# EAGLE board Generador de funciones ander (EAGLE 7.6.0)
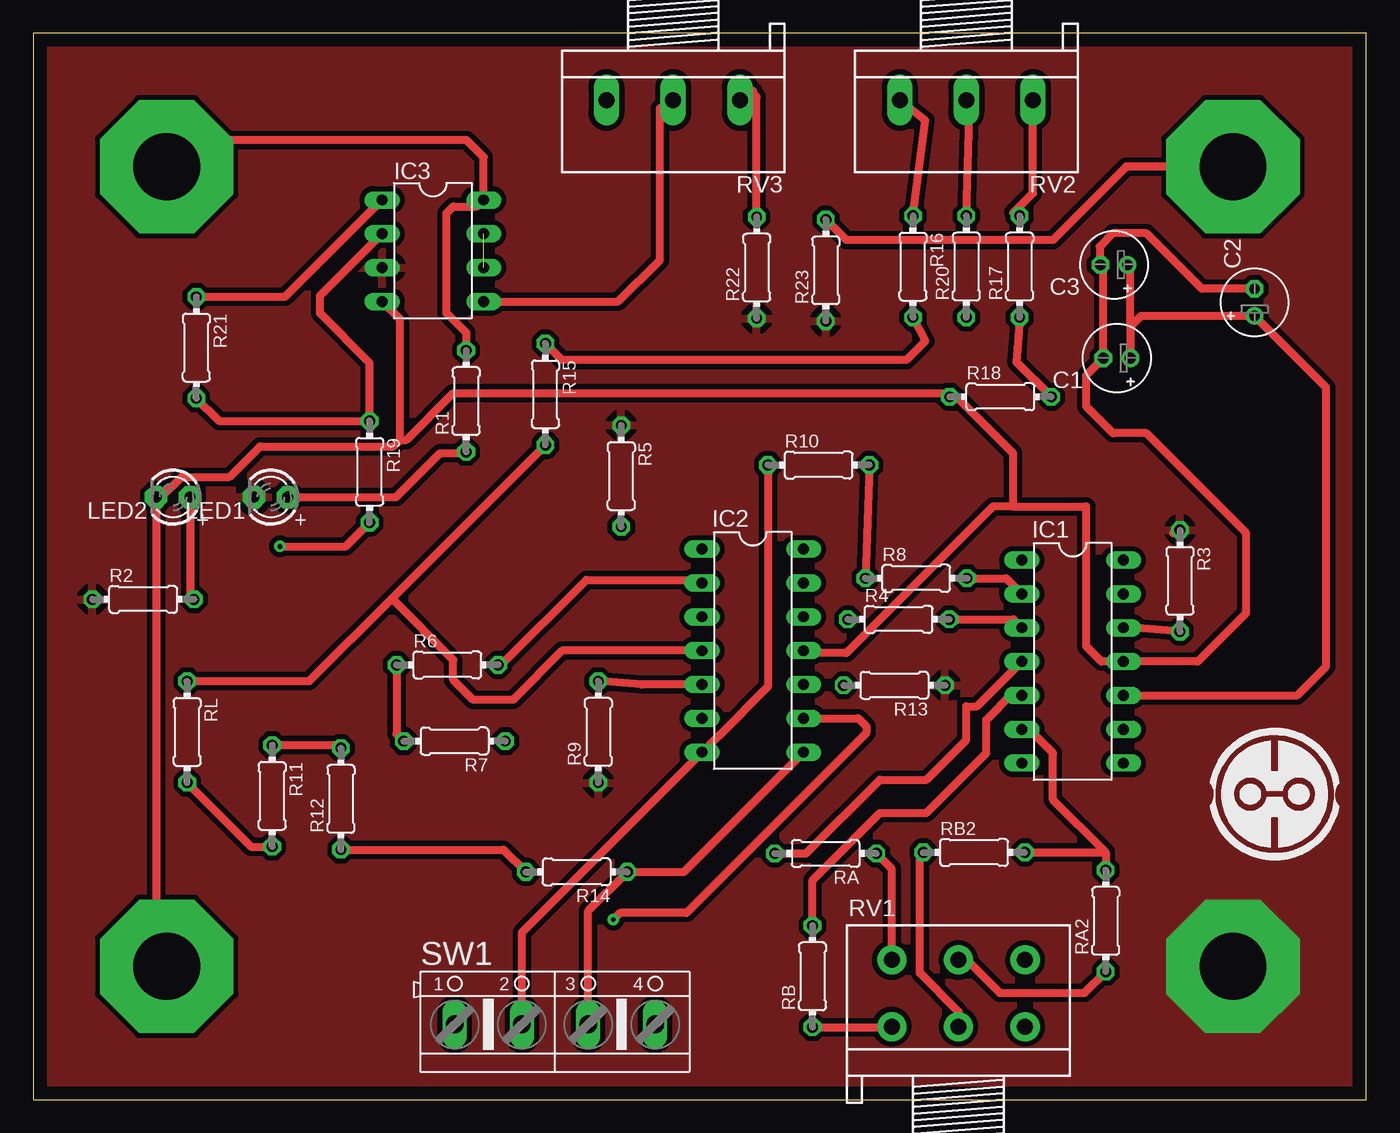
[diagram p0: board, top side]
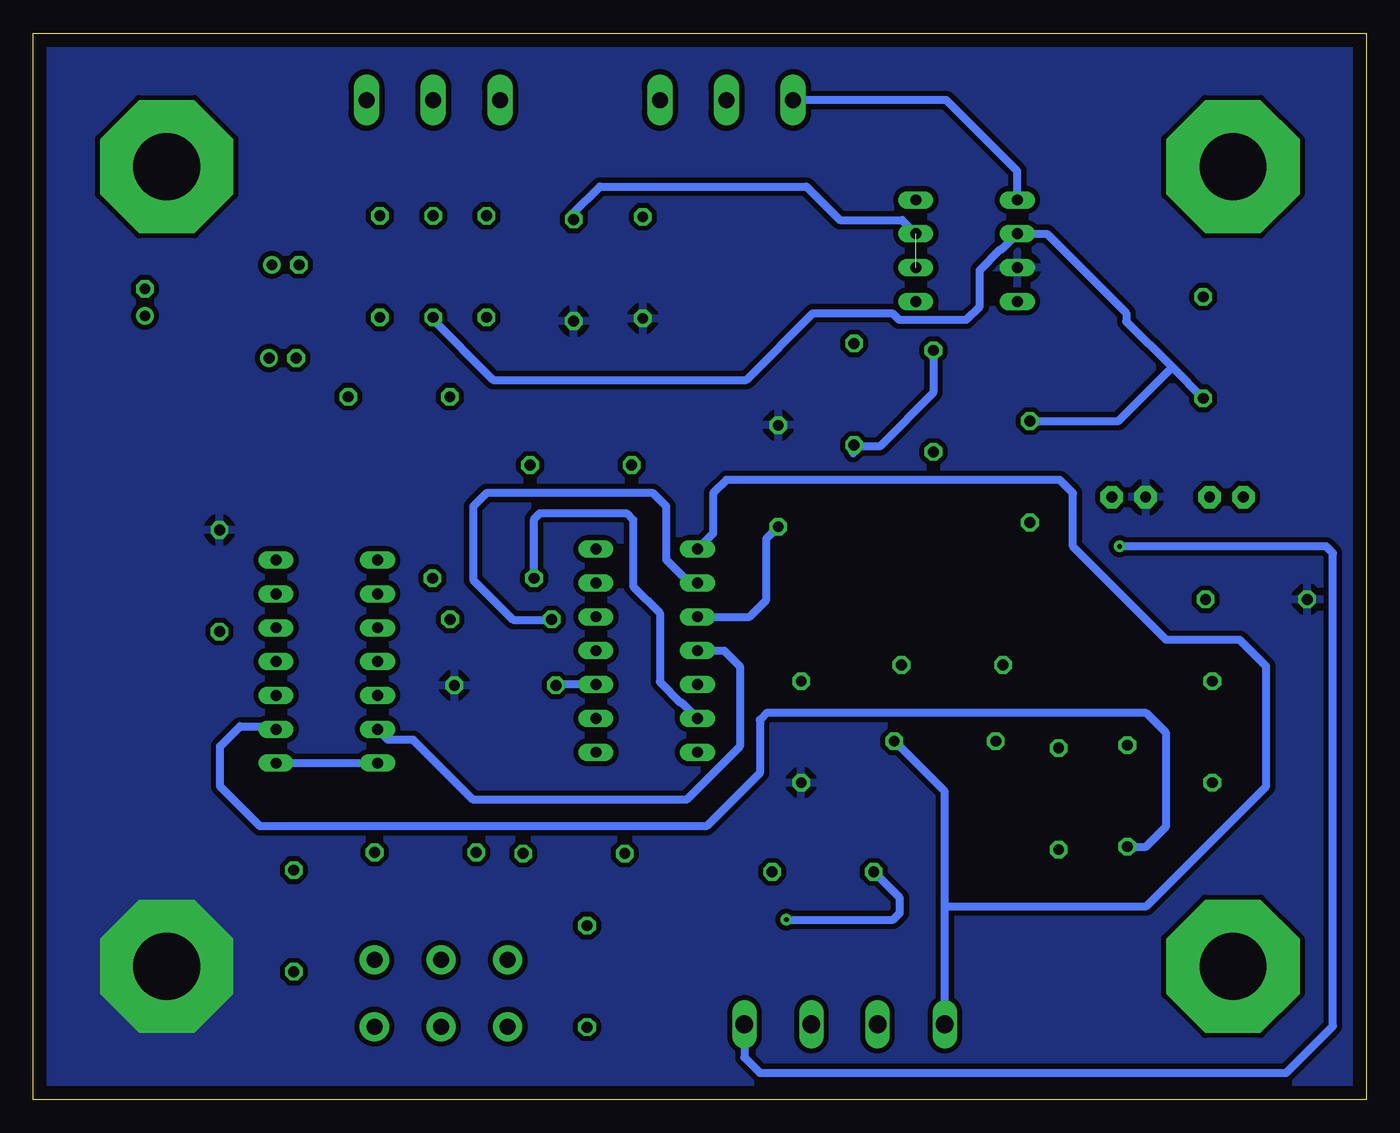
[diagram p1: board, bottom side, seen from below]

Size 100 x 80 mm. Coordinates in mm from the lower left corner, seen from the top.
Outline: 0,0 100,0 100,80 0,80 0,0
Copper layers (1*16): Top 0.035mm / dielectric 1.5mm / Bottom 0.035mm
Design rules "DRC_Serigrafia_2capa": minimum track width 25mil, minimum drill 0.7mm, track to track 15mil, track to pad 15mil, pad to pad 15mil, via to via 15mil, smd to smd 10mil, copper to edge 40mil, drill to drill 15mil, minimum pad ring 10mil, minimum via ring 10mil, stop-mask expansion 4mil, vias tented up to drill 0mil, thermal gap 20mil

## Footprints (pad centres in the part's own frame; a part is rotated, then mirrored left to right if it is on the bottom)
E2-5 = drill 0.813 pad 1.27: + -1.016,0 | drill 0.813 pad 1.27 octagon: - 1.016,0
DIL14 = drill 0.813 long: 1 -7.62,-3.81; 2 -5.08,-3.81; 3 -2.54,-3.81; 4 0,-3.81; 5 2.54,-3.81; 6 5.08,-3.81; 7 7.62,-3.81; 8 7.62,3.81; 9 5.08,3.81; 10 2.54,3.81; 11 0,3.81; 12 -2.54,3.81; 13 -5.08,3.81; 14 -7.62,3.81
DIL08 = drill 0.813 pad 1.27 long: 1 -3.81,-3.81; 2 -1.27,-3.81; 3 1.27,-3.81; 4 3.81,-3.81; 5 3.81,3.81; 6 1.27,3.81; 7 -1.27,3.81; 8 -3.81,3.81
LED3MM = drill 0.813 pad 1.676 octagon: A -1.27,0; K 1.27,0
0204/7 = drill 0.813 octagon: 1 -3.81,0; 2 3.81,0
3RP/1610G = drill 1.2 pad 2.184: 1-1 -5,0; 1-2 0,0; 1-3 5,0; 2-1 -5,5; 2-2 0,5; 2-3 5,5
3RP/1610N = drill 1.2 pad 1.93 long: 1 -5,0; 2 0,0; 3 5,0
AK500/4 = drill 1.321 long: 1 -7.518,0; 2 -2.489,0; 3 2.489,0; 4 7.518,0

## Placement (x,y rotation side)
C1  10u  [E2-5]  81.3,55.63 180 top
C2  47u  [E2-5]  91.63,59.81 90 top
C3  47u  [E2-5]  81.08,62.63 180 top
IC1  ICL8038  [DIL14]  77.98,32.86 270 top
IC2  TL084P  [DIL14]  53.98,33.68 270 top
IC3  LF353N  [DIL08]  29.98,63.69 270 top
LED1  [LED3MM]  17.82,45.2 180 top
LED2  [LED3MM]  10.48,45.2 180 top
R1  3k3  [0204/7]  32.47,52.4 90 top
R2  3k3  [0204/7]  8.24,37.53 0 top
R3  82k  [0204/7]  86.03,38.92 270 top
R4  100k  [0204/7]  64.92,36.03 0 top
R5  56k  [0204/7]  44.11,46.78 270 top
R6  100k  [0204/7]  31.06,32.61 0 top
R7  33k  [0204/7]  31.6,26.89 180 top
R8  51k  [0204/7]  66.24,39.11 0 top
R9  33k  [0204/7]  42.39,27.58 90 top
R10  100k  [0204/7]  58.92,47.61 0 top
R11  20k  [0204/7]  17.92,22.78 270 top
R12  220k  [0204/7]  23.08,22.56 90 top
R13  68k  [0204/7]  64.6,31.08 180 top
R14  100k  [0204/7]  40.76,17.08 180 top
R15  2k  [0204/7]  38.42,52.92 270 top
R16  68k  [0204/7]  66,62.5 270 top
R17  2k  [0204/7]  74,62.5 90 top
R18  68k  [0204/7]  72.56,52.73 0 top
R19  1M  [0204/7]  25.23,47.1 270 top
R20  1M  [0204/7]  70,62.5 90 top
R21  1M  [0204/7]  12.23,56.42 270 top
R22  100R  [0204/7]  54.27,62.42 90 top
R23  20k  [0204/7]  59.46,62.22 90 top
RA  10k  [0204/7]  59.44,18.46 180 top
RA2  1k  [0204/7]  80.46,13.4 90 top
RB  10k  [0204/7]  58.46,9.24 90 top
RB2  1k  [0204/7]  70.58,18.54 0 top
RL  4k7  [0204/7]  11.54,27.58 270 top
RV1  500k  [3RP/1610G]  69.41,5.47 0 top
RV2  100k  [3RP/1610N]  70,75 180 top
RV3  10k  [3RP/1610N]  48,75 180 top
SW1  [AK500/4]  39.14,5.64 0 top
U$1  LOGO_REDUCIDO  [LOGO_10MMX10MM]  93.13,22.91 0 top

## Library data of the parts
C1-C3 = rcl
IC1 = exar; OC_FARNELL: unknown; OC_NEWARK: unknown
IC2 IC3 = linear
LED1 LED2 = adafruit
R1-R23 RA RA2 RB RB2 RL = resistor
RV1-RV3 = pot
SW1 = con-ptr500; OC_FARNELL: unknown; OC_NEWARK: unknown
U$1 = Ingenialo_logos

## Nets
+12V: IC1.6 IC2.4 IC3.8 R1.2 R15.2 RA2.2 RB2.2 RL.1
-12V: C1.- C2.- C3.- IC1.11 IC2.11 IC3.4 LED2.K R18.1
GND: IC3.3 LED1.K R2.1 R3.1 R5.1 R9.1 R13.1 R22.1 R23.1
N$1: IC1.7 IC1.8
N$2: C1.+ C2.+ C3.+ IC1.10
N$3: IC1.12 R3.2
N$4: IC1.4 RA.2
N$5: IC1.5 RB.2
N$6: RA.1 RV1.2-1
N$7: RB2.1 RV1.1-2
N$8: RB.1 RV1.1-1
N$9: RA2.1 RV1.2-2
N$10: LED1.A R1.1
N$11: LED2.A R2.2
N$12: IC2.3 R5.2
N$13: IC2.2 R4.1 R6.2
N$14: IC2.9 R12.1 R14.2
N$15: R6.1 R7.2
N$16: IC2.6 R8.1 R10.2
N$17: IC2.5 R9.2
N$18: IC2.10 R13.2
N$19: R11.1 R12.2
N$20: R19.2 SW1.4
N$21: IC3.1 R21.1 RV3.3
N$22: IC3.2 R19.1 R20.1 R21.2
N$23: R15.1 R16.2
N$24: R16.1 RV2.3
N$25: R17.2 RV2.1
N$26: R17.1 R18.2
N$27: IC3.5 RV3.2
N$28: R22.2 RV3.1
OFFSET: R20.2 RV2.2
OUT: IC3.6 IC3.7 R23.2
OUT1: IC2.1 R7.1 SW1.1
OUT2: IC2.7 R10.1 SW1.2
OUT3: IC2.8 R14.1 SW1.3
QUAD: IC1.9 R11.2 RL.2
SIN: IC1.2 R8.2
TRI: IC1.3 R4.2

## Tracks (layer width: path | path; a pad name or v marks a point on that pad's centre or on a via)
+12V  (via drill 5 pad 10)
  Top 0.61: 80.46,18.54 RA2.2 | 80.46,18.54 76.5,22.5 76.5,26 74.5,28 74.39,28 IC1.6 | RB2.2 80.46,18.54 | R1.2 32.47,57.53 31,59 31,66.5 31.5,67 33.29,67 IC3.8 33.79,70.71 32.5,72 12,72 v10,70 | RL.1 20.7,31.39 26.91,37.59 | 26.91,37.59 R15.2 | IC2.4 39.68,33.68 36,30 33,30 31.5,31.5 31.5,33 26.91,37.59
  Bottom 0.61: R1.2 32.47,53.03 36.5,49 38,49 38.5,48.5 38.5,49.03 R15.2 | IC2.4 48.18,33.68 47,32.5 47,26.5 51,22.5 67,22.5 71.5,27 73.39,27 IC1.6
-12V  (via drill 5 pad 10)
  Top 0.61: C2.- 87.67,60.83 83.5,65 81,65 80,64 80,62.69 C3.- 80.28,62.41 C1.- 79,54.35 79,52 81,50 83.5,50 91,42.5 91,36.5 87.36,32.86 IC1.11 80.14,32.86 79,34 79,44.5 73.5,44.5 | 73.5,44.5 72,44.5 61,33.5 57.97,33.5 IC2.11 | 27.5,49.5 27,49 17,49 14.72,46.72 11.12,46.72 9.6,45.2 LED2.K 9.21,10.79 v10,10 | 27.5,49.5 27.5,58.55 IC3.4 | 27.5,49.5 28,49.5 31.5,53 68.5,53 69,52.5 68.98,52.5 R18.1 69.27,52.73 73.5,48.5 73.5,44.5
GND  (via drill 5 pad 10)
  Top 0.61: R3.1 85.73,42.73 85.5,42.5
  other vias: 90,10
  pour Top: -1,81 101,81 101,-1 -1,-1
  pour Bottom: -2,-2 -2,82 102,82 102,-2
N$1
  Bottom 0.61: IC1.8 IC1.7
N$2
  Top 0.61: 82.32,58 C1.+ | 82.32,58 82.32,62.41 C3.+ | IC1.10 94.82,30.32 97,32.5 97,53.42 C2.+ 83.11,58.79 82.32,58
N$3
  Top 0.61: R3.2 81.86,35.47 IC1.12
N$4
  Top 0.61: RA.2 57.96,18.46 63.5,24 67,24 70,27 70,29.5 70.79,29.5 72.95,31.67 72.98,31.67 IC1.4
N$5
  Top 0.61: RB.2 58.46,16.46 63.5,21.5 67,21.5 71.5,26 71.5,28.5 73.5,30.5 73.99,30.5 IC1.5
N$6
  Top 0.61: RV1.2-1 64.41,17.3 RA.1
N$7
  Top 0.61: RV1.1-2 69.41,6.59 66.5,9.5 66.5,18.27 RB2.1
N$8
  Top 0.61: RB.1 64.37,5.43 RV1.1-1
N$9
  Top 0.61: RV1.2-2 70.03,10.47 72.5,8 78.87,8 RA2.1
N$10
  Top 0.61: LED1.A 27.2,45.2 30.5,48.5 32.38,48.5 R1.1
N$11
  Top 0.61: LED2.A 11.75,37.83 R2.2
N$12
  Bottom 0.61: IC2.3 46.28,36.22 45,37.5 45,42.08 R5.2
N$13
  Top 0.61: R6.2 35.11,32.61 41.5,39 49.93,39 IC2.2
  Bottom 0.61: IC2.2 50.76,38.76 52.5,40.5 52.5,44.5 53.5,45.5 66,45.5 67,44.5 67,39 64,36 61.14,36 R4.1
N$14  (via drill 0.35)
  Top 0.61: R12.1 35.28,18.75 R14.2 | IC2.9 61.9,28.6 62.5,28 62.5,27.5 49,14 44,14 v43.5,13.5
  Bottom 0.61: v43.5,13.5 35.5,13.5 35,14 35,15.13 R14.2
N$15
  Top 0.61: R6.1 27.25,27.43 R7.2
N$16
  Top 0.61: R10.2 R8.1
  Bottom 0.61: R8.1 62.43,43.57 62,44 55.5,44 55,43.5 55,38.5 53,36.5 53,31.33 51.43,29.76 51.33,29.76 IC2.6
N$17
  Top 0.61: IC2.5 45.64,31.14 R9.2
N$18
  Bottom 0.61: IC2.10 60.73,31.14 R13.2
N$19
  Top 0.61: R11.1 22.86,26.59 R12.2
N$20  (via drill 0.35)
  Top 0.61: v18.5,41.5 23.44,41.5 R19.2
  Bottom 0.61: SW1.4 46.66,3.16 45.5,2 6,2 2.5,5.5 2.5,41 3,41.5 v18.5,41.5
N$21
  Top 0.61: IC3.1 24.98,66.31 24.95,66.31 18.88,60.23 R21.1
  Bottom 0.61: IC3.1 26.17,69.67 31.5,75 RV3.3
N$22
  Top 0.61: R21.2 13.93,50.91 R19.1 25.23,55.27 21.5,59 21.5,60.31 24.95,63.77 24.98,63.77 IC3.2
  Bottom 0.61: 14.56,54.94 18,58.38 18,59 23.96,64.96 IC3.2 27.33,63.8 27.43,63.8 29,62.23 29,59.5 30,58.5 35.05,58.5 35.55,59 41.5,59 46.5,54 65.5,54 70.27,58.77 R20.1 | 14.56,54.94 R21.2 | R19.1 18.59,50.91 14.56,54.94
N$23
  Top 0.61: R16.2 66.92,56.92 65.5,55.5 39.65,55.5 R15.1
N$24
  Top 0.61: R16.1 66.92,73.48 RV2.3
N$25
  Top 0.61: R17.2 73.53,66.53 75,68 RV2.1 75,75.4
N$26
  Top 0.61: R17.1 73.77,55.33 R18.2
N$27
  Top 0.61: IC3.5 43.88,59.88 47,63 47,74.38 RV3.2
N$28
  Top 0.61: R22.2 54.27,75.23 54,75.5 54,75.68 RV3.1
OFFSET
  Top 0.61: R20.2 70.27,75.13 RV2.2
OUT  (via drill 5 pad 10)  (1 unrouted)
  Top 0.61: v90,70 82,70 76.5,64.5 60.99,64.5 R23.2
  Bottom 0.61: R23.2 59.46,66.54 57.5,68.5 42,68.5 39.5,66 34.83,66 IC3.7
OUT1
  Bottom 0.61: SW1.1 31.62,14.5 | 31.62,14.5 31.62,23.1 R7.1 | 31.62,14.5 16.5,14.5 7.5,23.5 7.5,32.5 9.5,34.5 15,34.5 22,41.5 22,45.5 23,46.5 48,46.5 49,45.5 49,42.47 IC2.1
OUT2
  Top 0.61: SW1.2 36.65,12.54 50.05,25.95 IC2.7 51.36,27.25 51.39,27.25 55.11,30.98 R10.1
OUT3
  Top 0.61: SW1.3 41.63,14.14 R14.1 48.81,17.08 IC2.8
QUAD
  Top 0.61: R11.2 16.34,18.97 RL.2
  Bottom 0.61: R11.2 16.53,18.97 15,20.5 15,27.5 16.5,29 45,29 45.5,28.5 45.5,24.5 49.5,20.5 83,20.5 86,23.5 86,26.5 84.5,28 82.01,28 IC1.9
SIN
  Top 0.61: R8.2 73,39.11 IC1.2
TRI
  Top 0.61: R4.2 73.54,36.03 IC1.3